# Altium PCB Sample_FFC_Con_Sensor_v1.PcbDoc
Units mil, origin at the board's own origin, x right, y up, seen from the top; angles counter-clockwise.
Board outline 213.48 x 345.19 mil, 2 copper layers (Top Layer, Bottom Layer); 3 components, 5 nets, 17 pads, 5 vias.
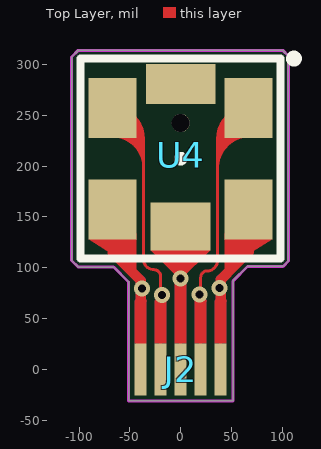
[diagram p0: Top Layer view]
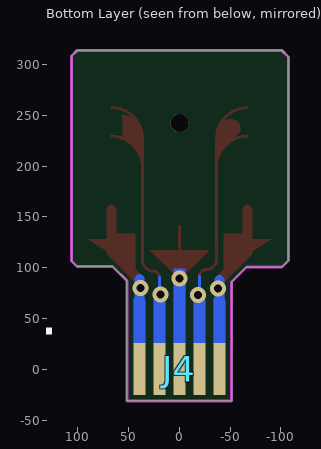
[diagram p1: Bottom Layer view, seen from below]

## Layer stack, top to bottom
Top Solder: solder mask 0.4, Solder Resist, Dk 3.5
Top Layer: signal copper 1.4
Dielectric 1: dielectric 12.6, FR-4, Dk 4.8
Bottom Layer: signal copper 1.4
Bottom Solder: solder mask 0.4, Solder Resist, Dk 3.5

## Board outline
-51.4,-31.17 -51.4,86.04 -66.05,100.69 -100.96,100.69 -107.42,107.16 -107.42,307.48 -100.88,314.02 100.45,314.02 106.06,308.41 106.06,106.57 100.79,101.29 65.79,101.29 51.58,87.09 51.58,-31.17

## Design rules (kind name [scope] priority, off if disabled: settings)
Clearance [All] p1: gap=2.95 ignorepadtopadclearanceinfootprint=FALSE
PolygonConnect [All] p1: connectstyle=Relief reliefconductorwidth=10 reliefentries=4 polygonreliefangle="90 Angle" airgapwidth=10
RoutingVias [All] p1: holewidth=7.87 width=15.75 viastyle="Through Hole" minholewidth=7.87 minwidth=15.75 maxholewidth=7.87 maxwidth=15.75
SolderMaskExpansion [All] p1: expansion=4 istentingtop=FALSE
Width [All] p1: maxlimit=50 minlimit=2.95 preferedwidth=2.95
30 further rules are at their usual default settings.

## Components (designator, comment, footprint, x,y, rotation, side; value= is the part's Value field where it differs from the comment)
J2 "FPC0.5-5P-line" FPC0.5-5P-Line 0,-1.69 r180 top
J4 "FPC0.5-5P-line" FPC0.5-5P-Line 0,1.77 r180 bottom
U4 "FMAMSDXX005WCSC3" FMA_MICROFORCE_6 66.93,257.4 r270 top

## Footprints (in the part's own frame and the unit in brackets; to place one, negate y for a bottom-side part, rotate by r counter-clockwise, add the part's x,y. Pads: shape width x height; smd on the part's side, far side on the other; paste and mask are expansions set on the pad)
FMA_MICROFORCE_6 [mm]
  round 0.45 hole 0.45 unplated: 0(0.38,-1.7)
  rect 1.5x1.2 smd: 1(0,0) 2(2.54,0) 3(2.54,-3.4) 4(0,-3.4)
  rect 1.2x1.5 smd: 5(2.97,-1.7)
  rect 1x1.73 smd: 6(-0.59,-1.7)
  silkscreen extent -1.3,-4.2 3.77,1.2, body extent -1.23,-4.2 3.77,0.8, height 2.55
FPC0.5-5P-Line [mm]
  rect 0.3x1.3 smd: 1(-1,-0.043) 2(-0.5,-0.043) 3(0,-0.043) 4(0.5,-0.043) 5(1,-0.043)

## Part data
U4: "Force Range: 5N  / Output: SPI  / FMA Series Force Sensor, compensated/amplified, mechanically  / coupled, sphere contact element, sensor short and open  / diagnostics, 5 N force range, compression force type, SPI digital  / output, 20% to 80% transfer function, 3.3 V ±10% supply voltage"

## Via types
v1: diameter 15.75, hole 7.87, Top Layer to Bottom Layer, 5 vias

## Nets (pads, with @x,y where several pads share a name; then routed paths per layer and width w, separated by ;. In a path a pad name is that pad's centre, name@x,y a point inside that pad or via, vN(x,y) a via of type N, cw(c..) or ccw(c..) an arc to the next point about the centre after c; other vN are vias at no path point)
GND: J2.5 J4.5 U4.3 | length 210.1
  Top Layer w10: U4.3 -66.93,114.91 -53.86,101.84 -39.37,87.35 -39.37,46.06 J2.5
  Bottom Layer w10: -39.37,46.46 -39.37,87.74
  other v1: -38.19,79.72
MISO: J2.3 J4.3 U4.5 | length 140.5
  Top Layer w2.95: J2.3 0,62.01 U4.5
  other v1: 0,89.37
SCLK: J2.4 J4.4 U4.4 | length 373.4
  Top Layer w2.95: U4.4@-67.19,257.51 cw(c-67.19,226.98) -36.66,226.98 -36.66,203.45 ; U4.4@-66.86,229.5 cw(c-66.86,198.97) -36.66,203.45 ; J2.4 -19.69,46.06 -19.69,91.34 ccw(c-26.38,91.34) -26.38,98.03 cw(c-26.38,108.31) -36.66,108.31 -36.66,203.45
  Bottom Layer w2.95: -19.69,46.46 -19.69,91.73
  other v1: -18.5,73.23
SS: J2.1 J4.1 U4.2 | length 214.1
  Top Layer w2.95: J2.1 39.37,43.02 ; U4.2@66.67,157.4 U4.2@66.67,157.51
  Top Layer w10: 39.37,43.02 39.37,88.21 53.82,102.67 66.72,115.56 66.93,115.77 U4.2
  Bottom Layer w10: 39.37,43.41 39.37,88.61
  other v1: 38.19,79.92
VCC: J2.2 J4.2 U4.1 | length 376.7
  Top Layer w2.95: J2.2 19.68,46.06 19.68,90.55 cw(c25.98,90.55) 25.98,96.85 ccw(c25.98,107.06) 36.19,107.06 36.19,198.98 36.19,227.03 cw(c66.67,227.03) U4.1@66.67,257.51 ; 36.42,198.98 cw(c66.9,198.98) U4.1@66.9,229.46
  Bottom Layer w2.95: 19.68,46.46 19.68,90.94
  other v1: 18.5,73.43
pads on no net: U4.0 U4.6

## Keep-outs
Keep-Out Layer:
  the board outline again, w2.95

## Other copper
Top Layer:
  rectangle net GND: -69.29,112.99 -43.31,133.46
  rectangle net GND: -60.39,108.38 -48.19,121.37
  rectangle net GND: -57.28,98.43 -43.31,117.14
  rectangle net SS: 43.31,99.21 57.28,117.92
  rectangle net SS: 43.31,112.99 69.29,133.46
  rectangle net SS: 33.46,25.2 45.28,66.93
  rectangle net VCC: 13.78,25.2 25.59,66.93
  rectangle net MISO: -5.91,25.2 5.91,98.82
  rectangle net SCLK: -25.59,25.2 -13.78,66.93
  rectangle net GND: -45.28,25.2 -33.46,66.93
  region net SCLK: -37.9,212.55 ccw(c-37.9,213.79) -36.66,213.79 -36.66,232.38 ccw(c-50.58,232.38) -50.58,246.3 ccw(c-50.58,236.77) -60.11,236.77 -60.11,233.93
  region net VCC: 36.36,208.86 36.36,229 cw(c57.99,229) 57.99,250.64 ccw(c57.99,248.38) 55.74,248.38 55.74,229.59
  region net GND: -43.58,128.01 -90.67,128.07 -67.19,113.33
  region net VCC: 13.78,66.93 18.5,79.53 18.5,66.54
  region net VCC: 25.59,66.93 20.87,79.33 20.87,66.34
  region net SS: 33.46,66.93 38.19,79.53 38.19,66.54
  region net SS: 45.28,66.93 40.55,79.33 40.55,66.34
  region net SCLK: -13.78,66.93 -18.5,79.33 -18.5,66.34
  region net SCLK: -25.59,66.93 -20.87,79.53 -20.87,66.54
  region net GND: -33.46,66.93 -38.19,79.33 -38.19,66.34
  region net GND: -45.28,66.93 -40.55,79.53 -40.55,66.54
  region net SS: 90.28,128.01 43.19,128.07 66.67,113.33
  region net MISO: -29.59,117.1 -0.4,87.91 28.96,117.15
Bottom Layer:
  rectangle net SS: 33.46,25.59 45.28,67.32
  rectangle net VCC: 13.78,25.59 25.59,67.32
  rectangle net SCLK: -25.59,25.59 -13.78,67.32
  rectangle net MISO: -5.91,25.59 5.91,99.21
  rectangle net GND: -45.28,25.59 -33.46,67.32
  region net SCLK: -25.59,67.32 -20.87,79.92 -20.87,66.93
  region net SCLK: -13.78,67.32 -18.5,79.72 -18.5,66.73
  region net VCC: 25.59,67.32 20.87,79.72 20.87,66.73
  region net SS: 45.28,67.32 40.55,79.72 40.55,66.73
  region net SS: 33.46,67.32 38.19,79.92 38.19,66.93
  region net VCC: 13.78,67.32 18.5,79.92 18.5,66.93
  region net GND: -45.28,67.32 -40.55,79.92 -40.55,66.93
  region net GND: -33.46,67.32 -38.19,79.72 -38.19,66.73

## Silkscreen, mask and mechanical layers (free items; w line width, h text height)
Top Solder:
  rectangle: -49.21,29.53 49.21,65.35
Bottom Solder:
  rectangle: -49.21,29.53 49.21,65.35